# Altium PCB team-snax-mainboard.PcbDoc
Units mm, origin at the board's own origin, x right, y up, seen from the top; angles counter-clockwise.
Board outline 40.2 x 40.2 mm, 4 copper layers (Top Layer, GND 1, GND 2, Bottom Layer), stack 1.586 mm thick; 65 components, 50 nets, 261 pads, 163 vias.
Unrouted connection lines stored in the file: 1.
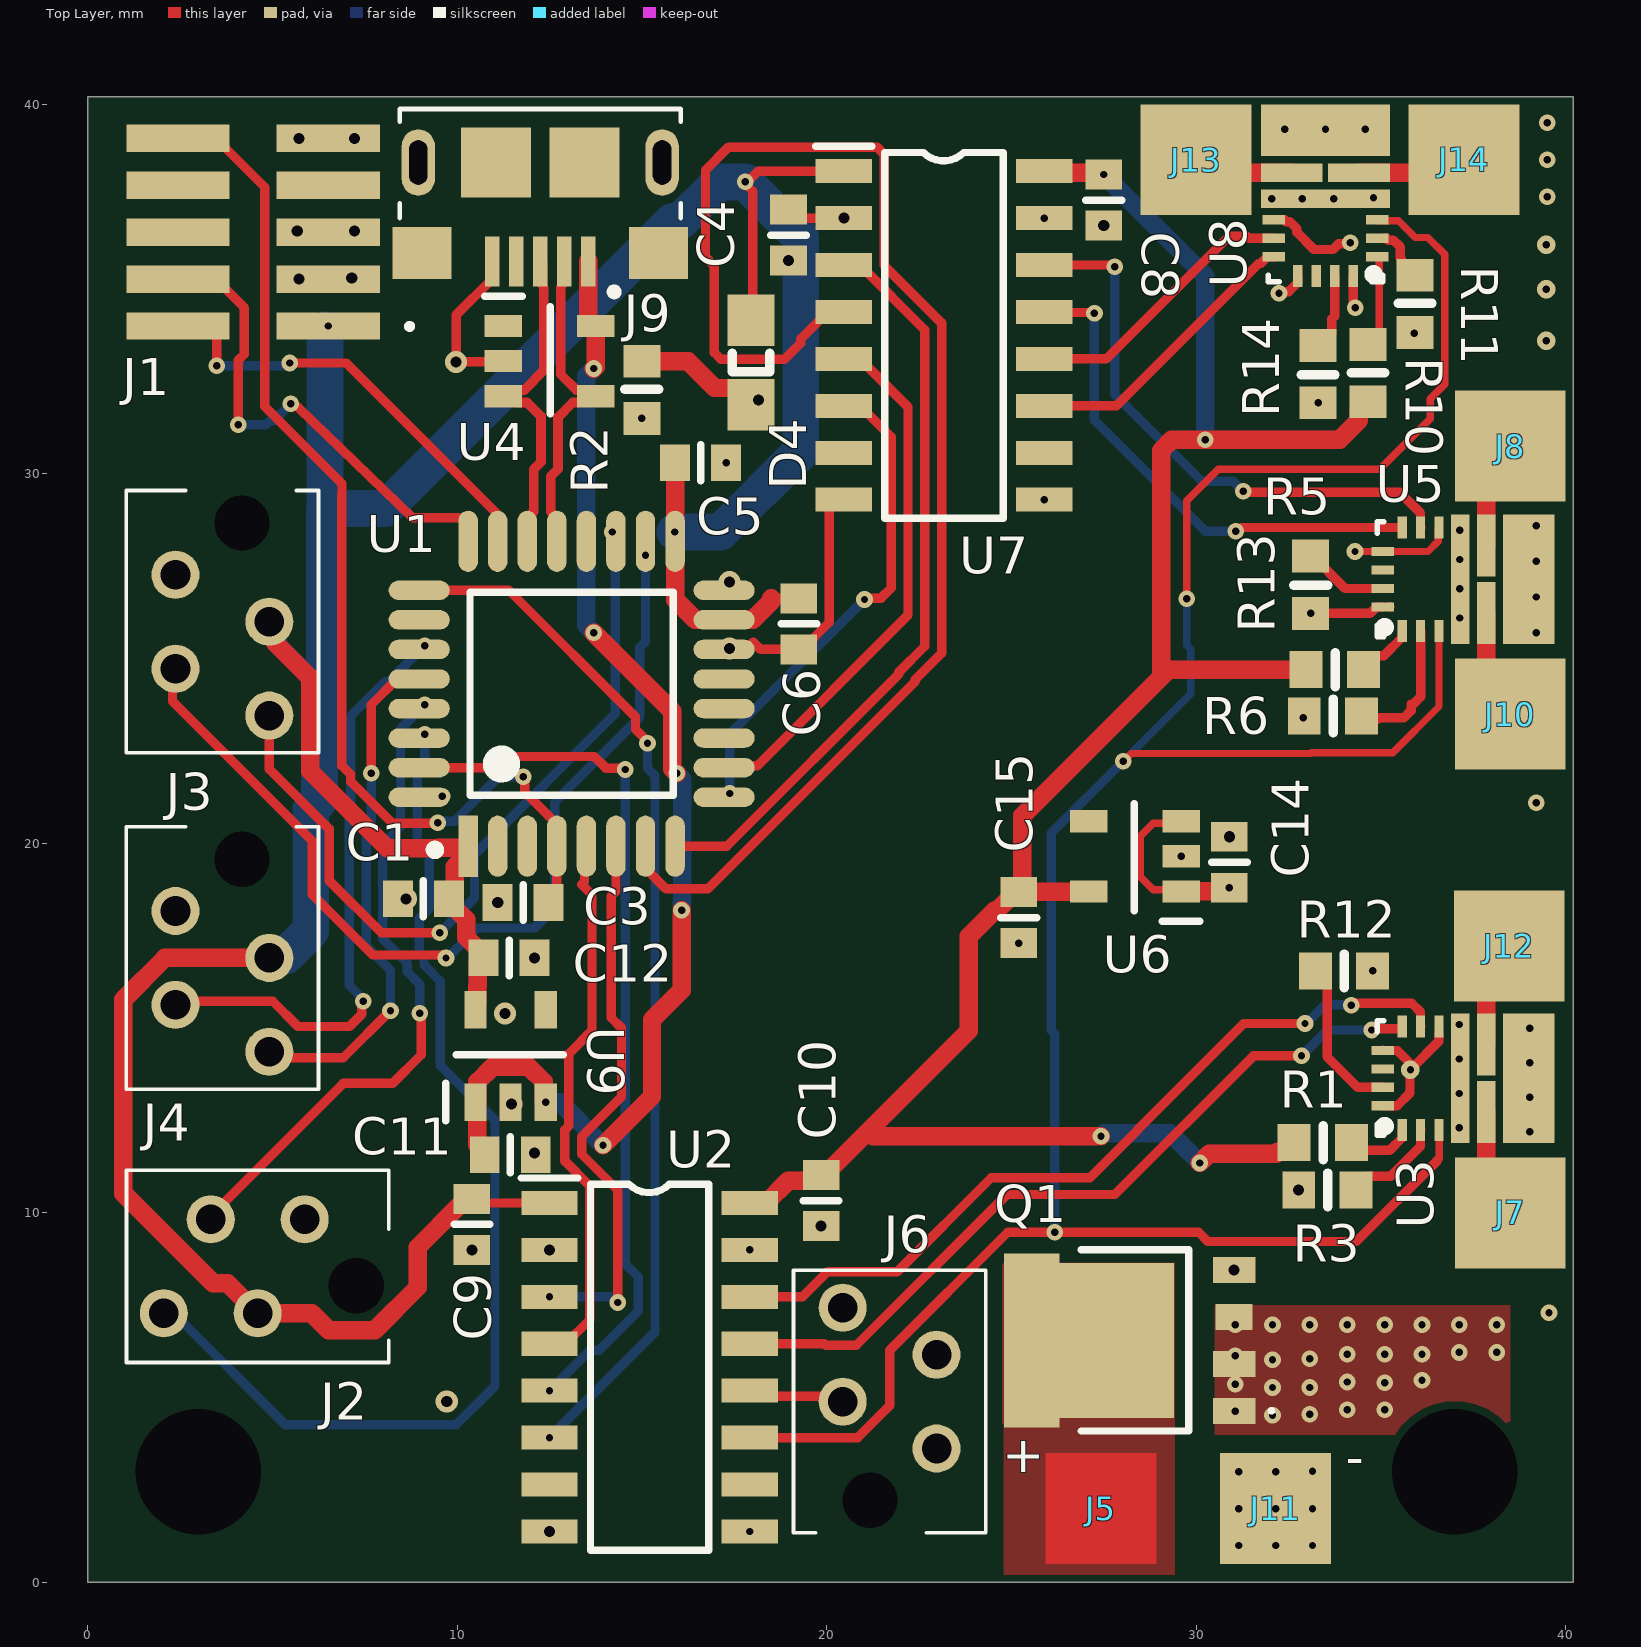
[diagram p0: Top Layer view]
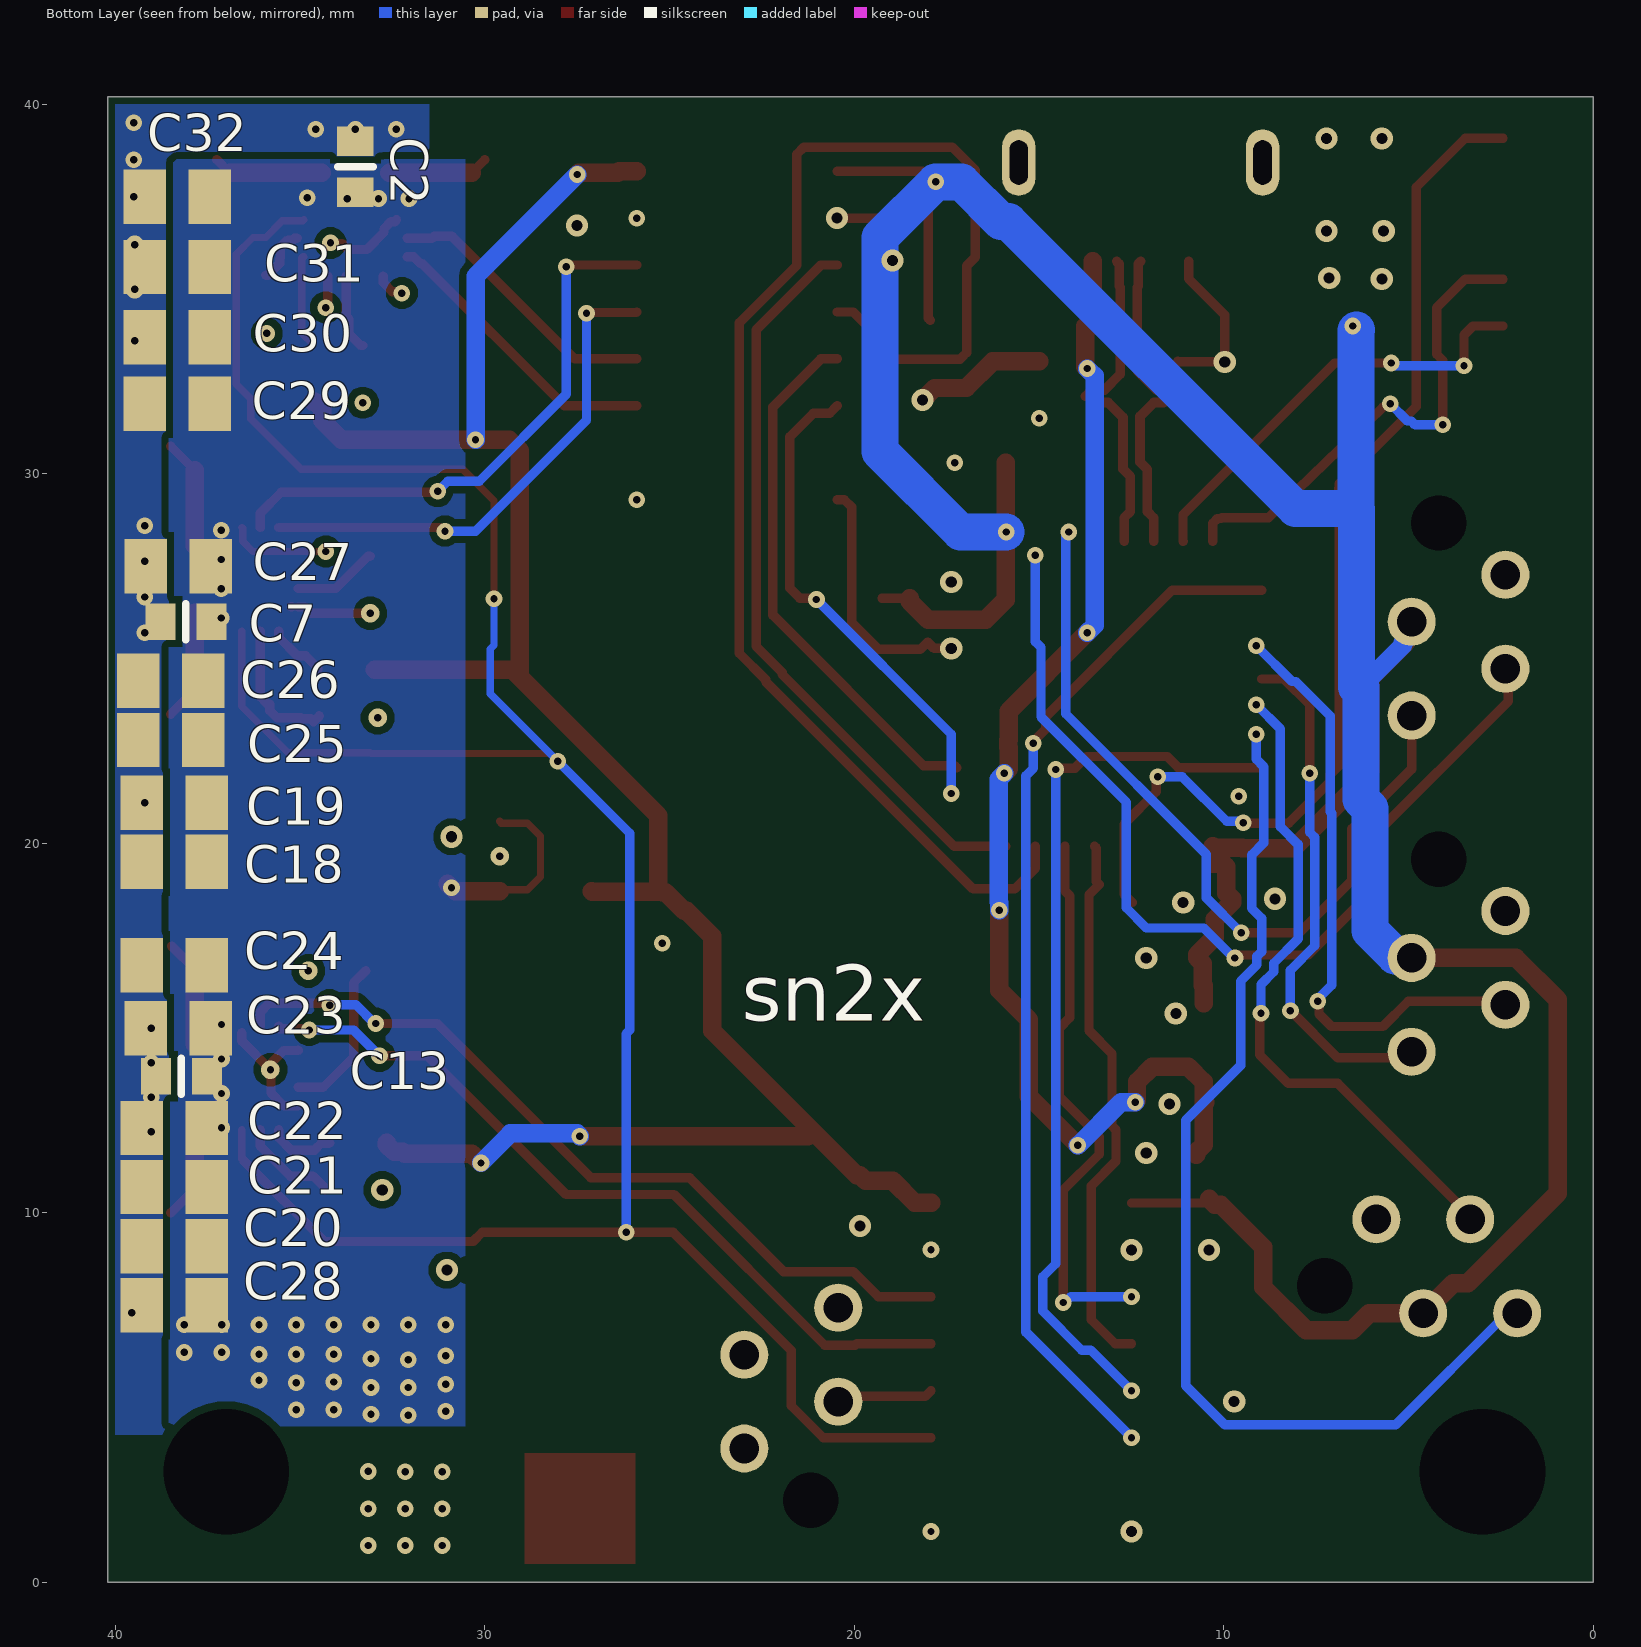
[diagram p1: Bottom Layer view, seen from below]
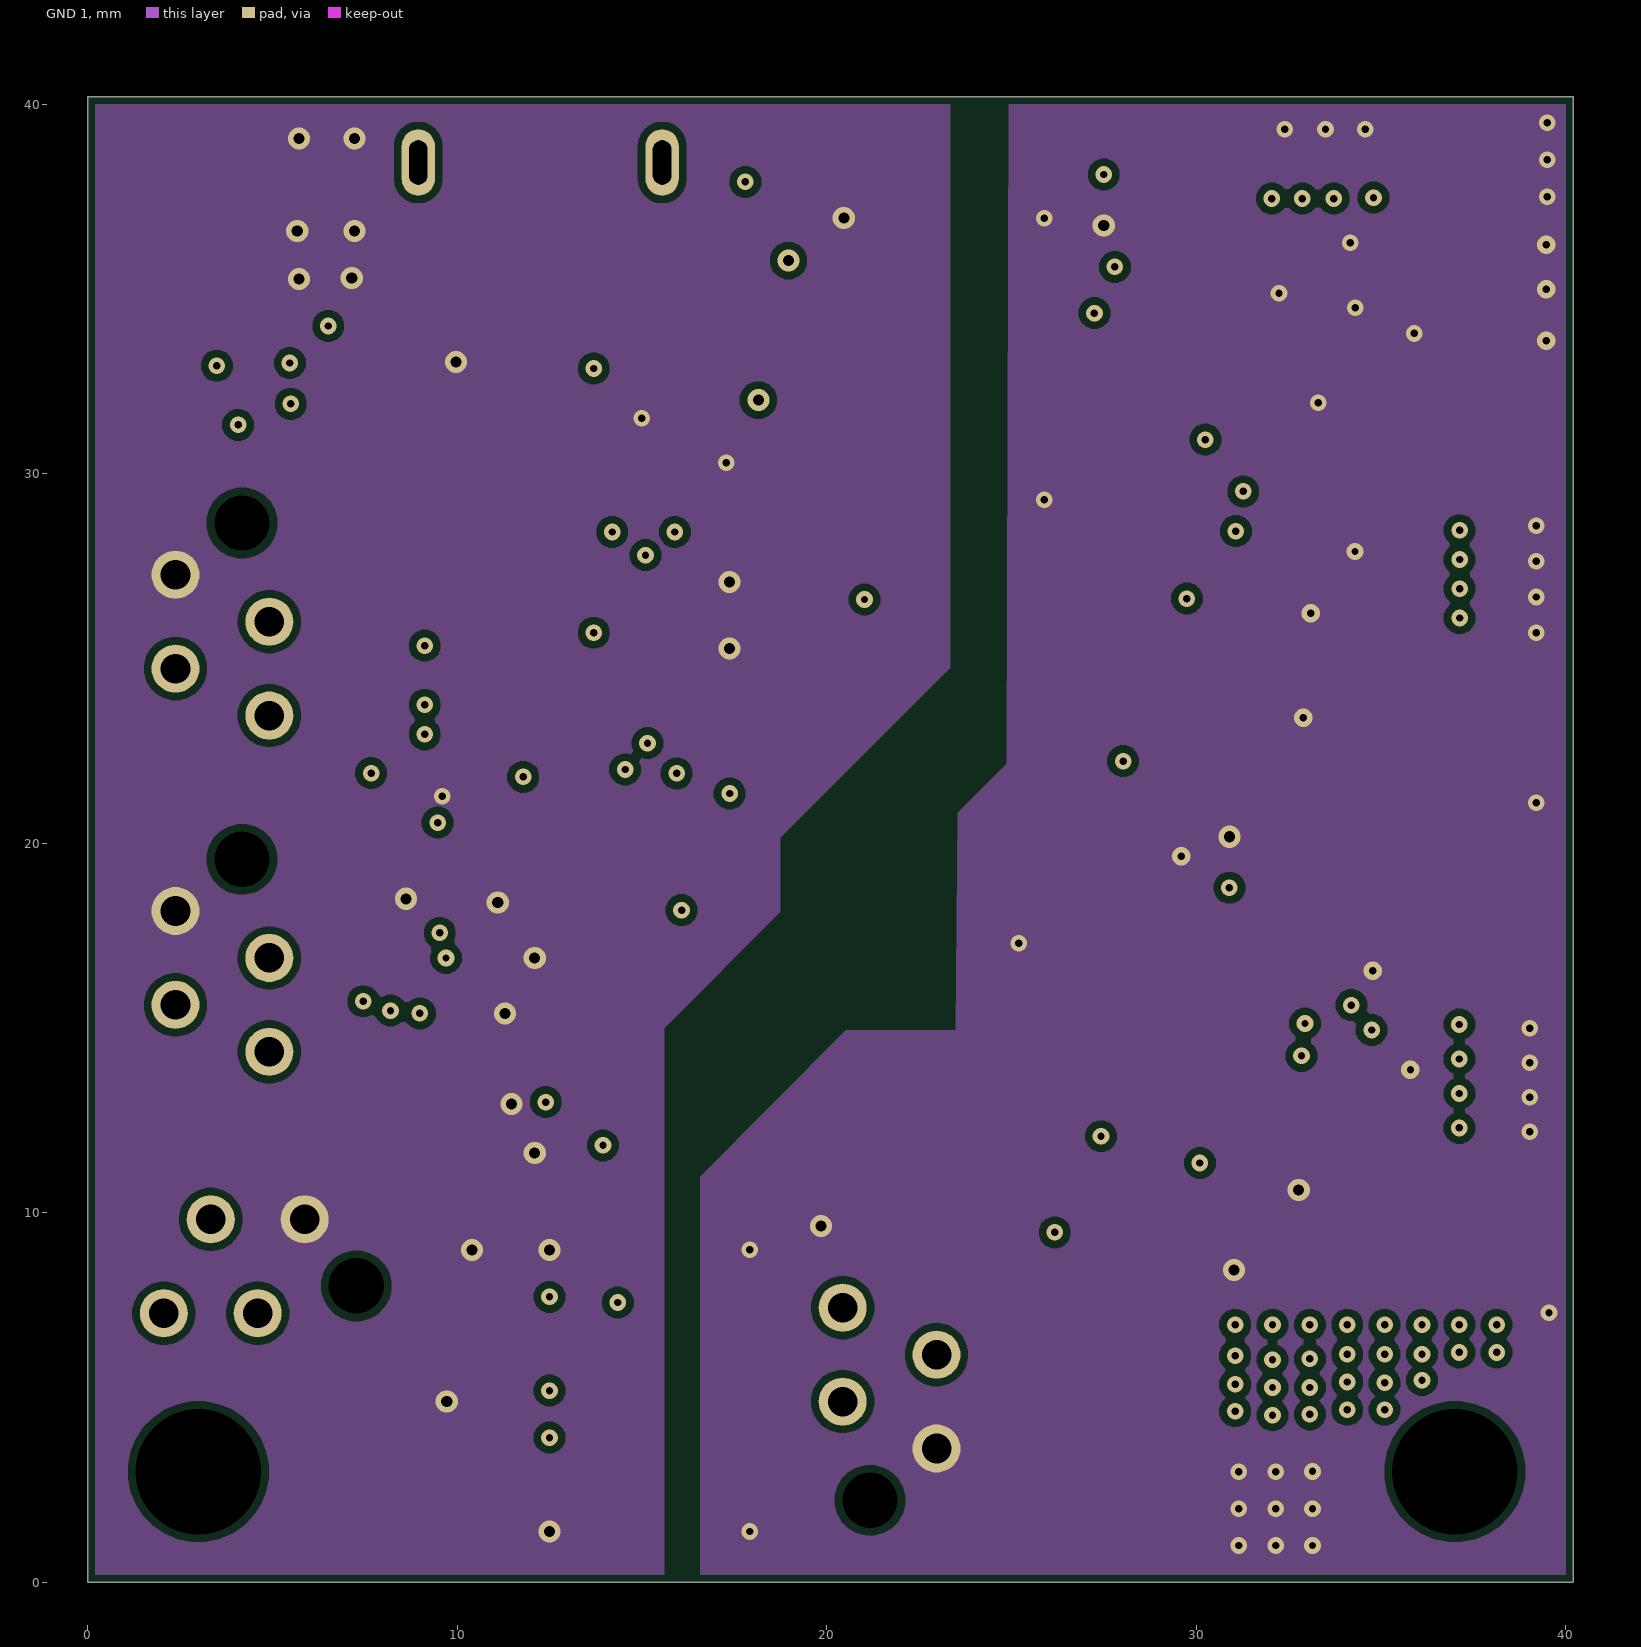
[diagram p2: GND 1]
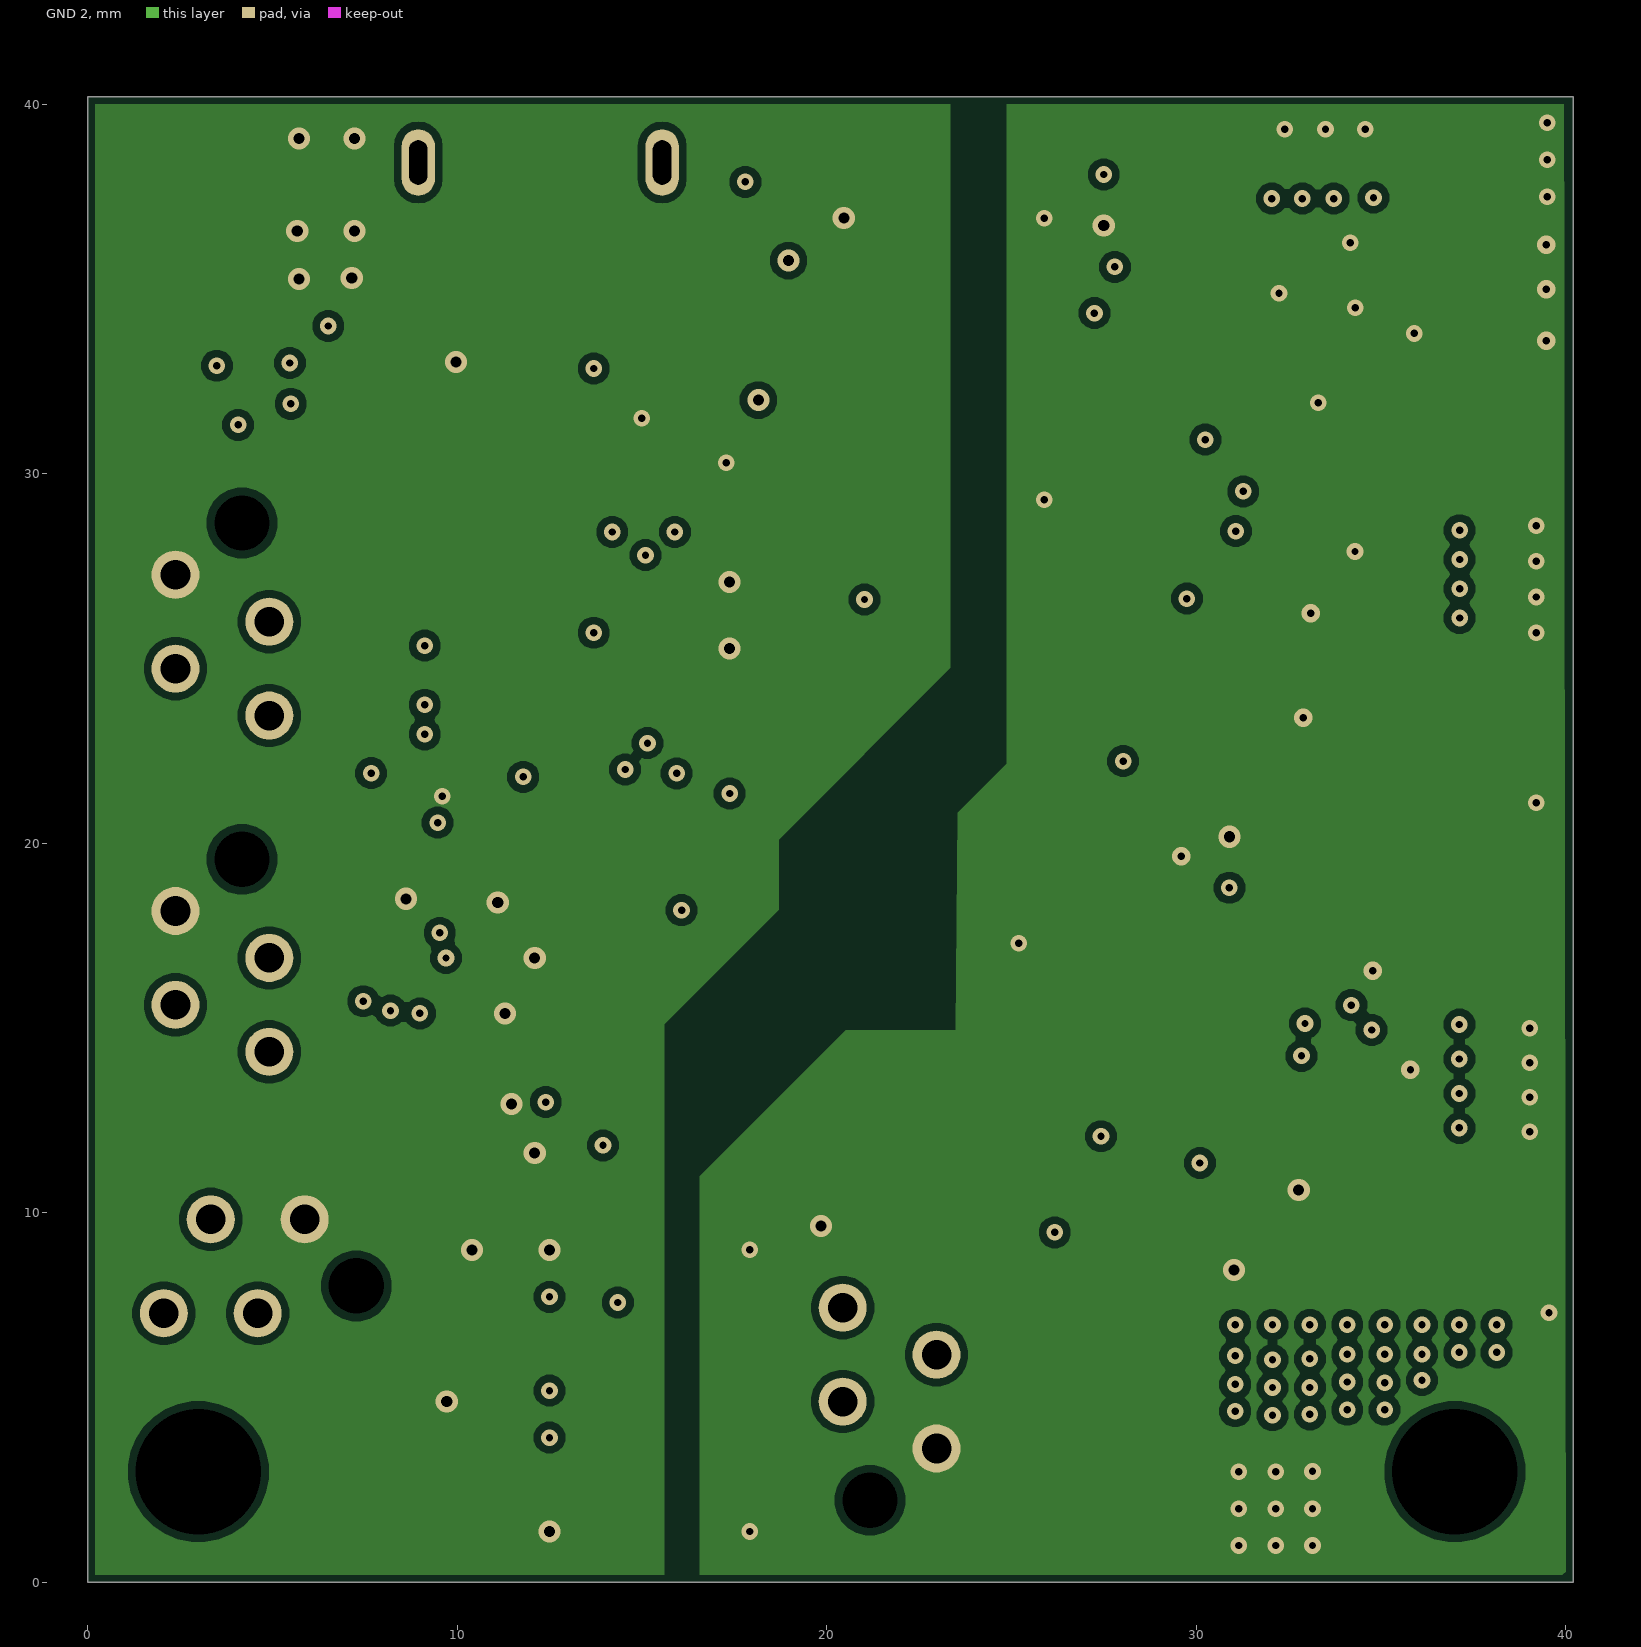
[diagram p3: GND 2]
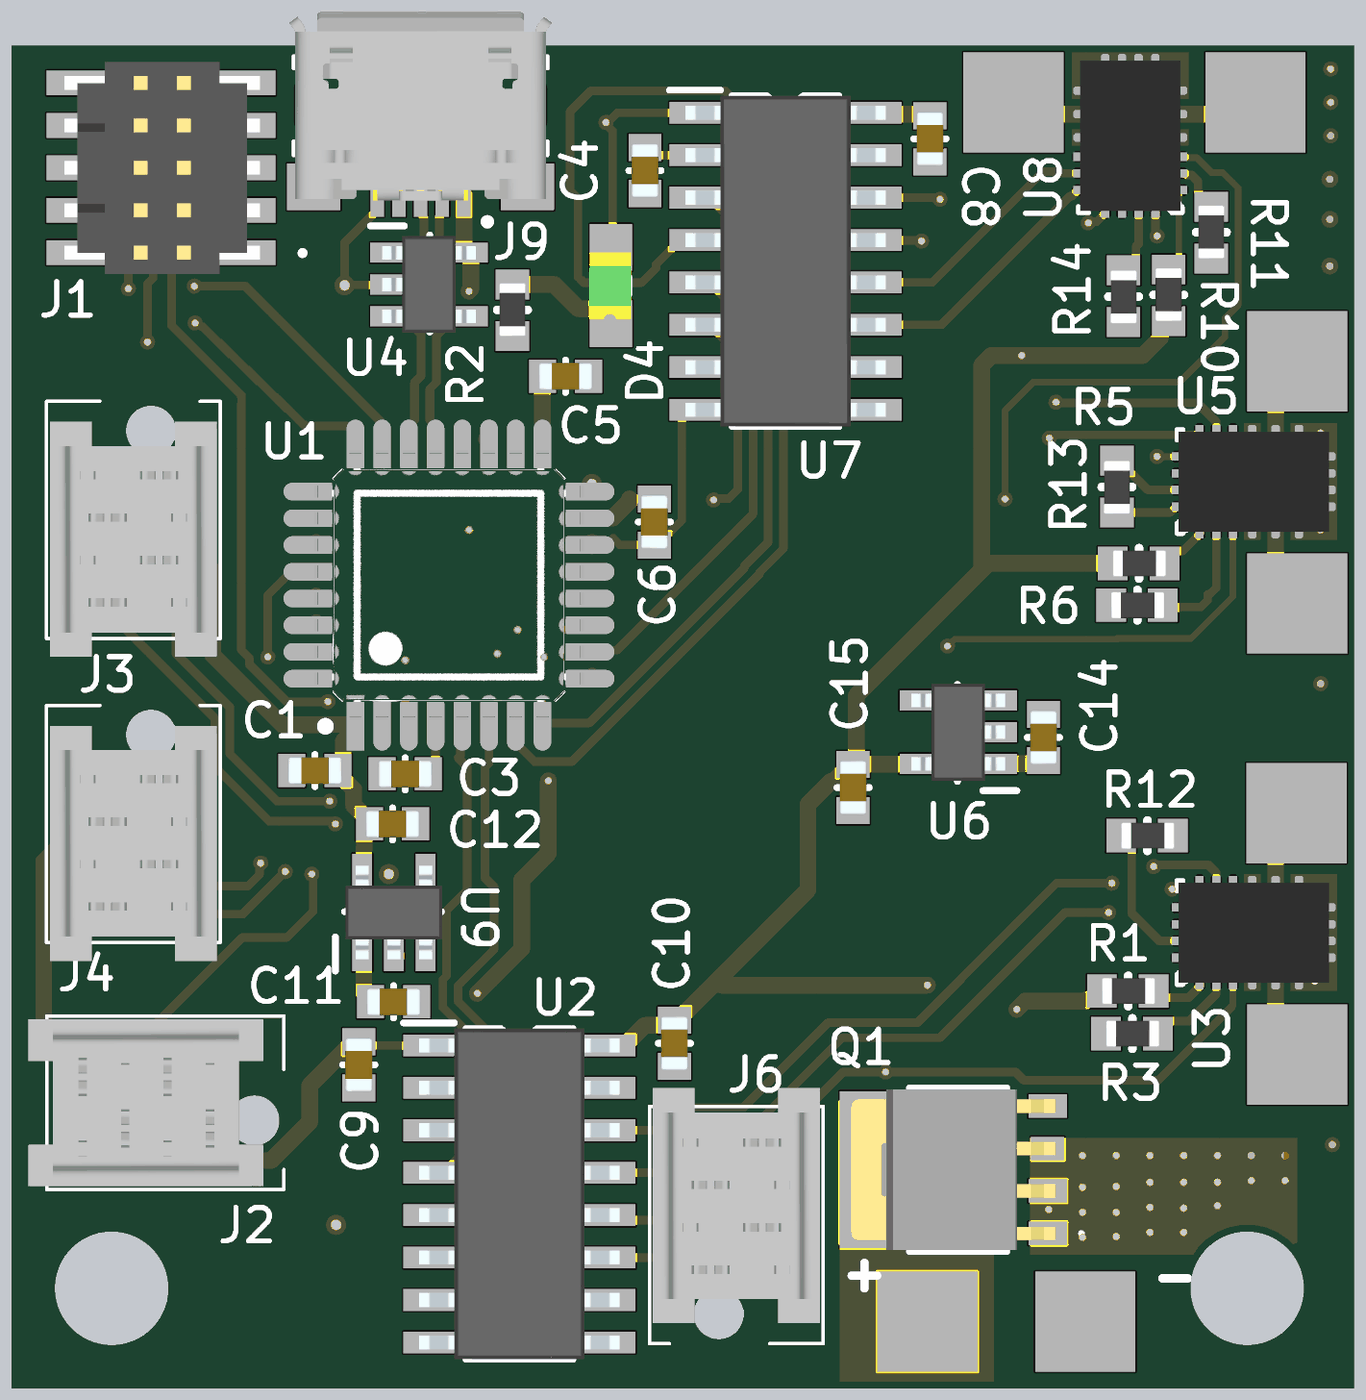
[diagram p4: 3D render of the assembled board from above, using the file's embedded part models]
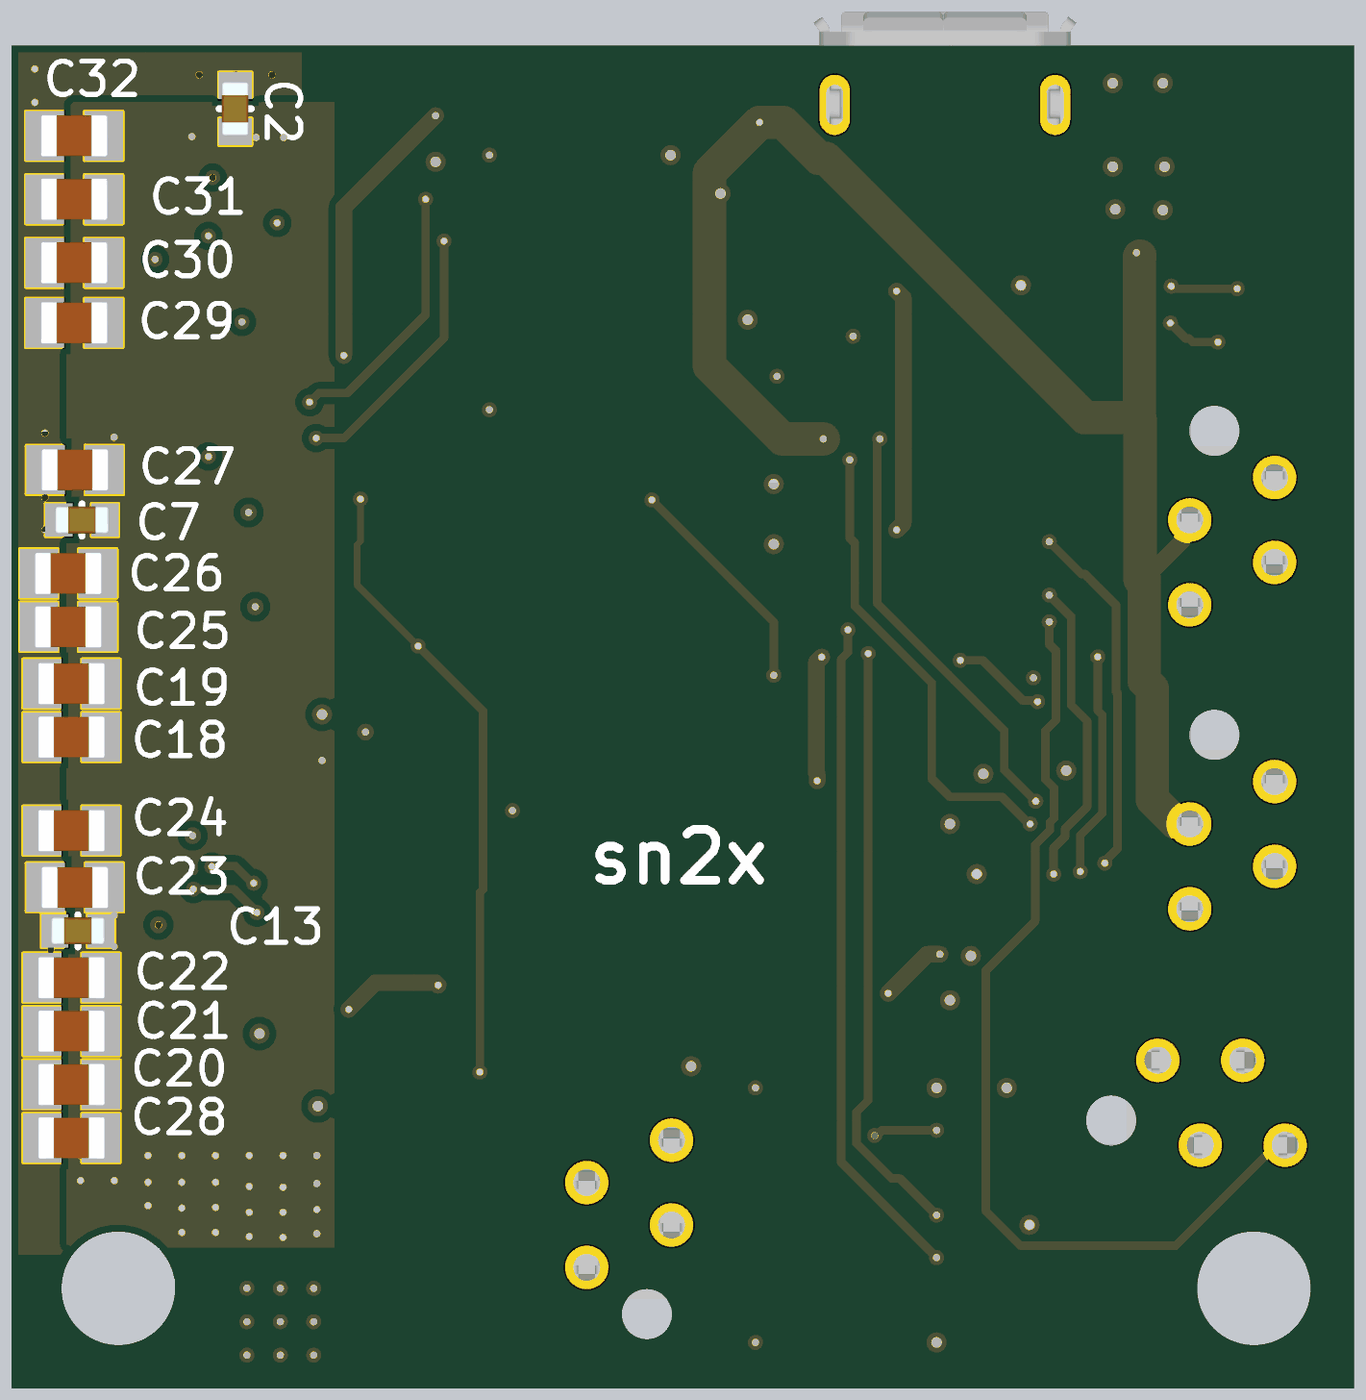
[diagram p5: 3D render of the assembled board from below, using the file's embedded part models]

## Layer stack, top to bottom
Top Solder: solder mask 0.0203, Solder Resist, Dk 3.8
Top Layer: signal copper 0.035
Dielectric 1: prepreg 0.2104, 7628, Dk 4.6
GND 1: signal copper 0.0152
Dielectric 2: dielectric 1.065, Core, Dk 4.6
GND 2: signal copper 0.0152
Dielectric 3: prepreg 0.2104, 7628, Dk 4.6
Bottom Layer: signal copper 0.035
Bottom Solder: solder mask 0.0203, Solder Resist, Dk 3.8

## Board outline
0,0 40.2,0 40.2,40.2 0,40.2

## Design rules (kind name [scope] priority, off if disabled: settings)
BoardOutlineClearance [All] p1: gap=0.2 ignorepadtopadclearanceinfootprint=FALSE except(0: Arc-SplitContinuation Track-SplitContinuation SMDPad-SplitContinuation THPad-SplitContinuation Via-SplitContinuation Fill-SplitContinuation Poly-SplitContinuation Region-SplitContinuation Text-SplitContinuation)
Clearance [All] p1: gap=0.2 ignorepadtopadclearanceinfootprint=TRUE except(0: Arc-Hole Track-Hole SMDPad-Hole THPad-Hole Via-Hole Fill-Hole Poly-Hole Region-Hole Text-Hole)
DiffPairsRouting DiffPairsRouting_USB [InDifferentialPairClass('USB')] p1: maxlimit=0.2 minlimit=0.2 mostfreqgap=0.2 toplayer_minwidth=0.26 toplayer_maxwidth=0.26 toplayer_prefwidth=0.26 midlayer1_minwidth=0.26 midlayer1_maxwidth=0.26 midlayer1_prefwidth=0.26 midlayer2_minwidth=0.26 midlayer2_maxwidth=0.26 midlayer2_prefwidth=0.26 bottomlayer_minwidth=0.26 bottomlayer_maxwidth=0.26 bottomlayer_prefwidth=0.26 maxuncoupledlength=12.7
DiffPairsRouting [All] p2: maxlimit=0.2 minlimit=0.2 mostfreqgap=0.2 toplayer_minwidth=0.15 toplayer_maxwidth=0.15 toplayer_prefwidth=0.15 midlayer1_minwidth=0.15 midlayer1_maxwidth=0.15 midlayer1_prefwidth=0.15 midlayer2_minwidth=0.15 midlayer2_maxwidth=0.15 midlayer2_prefwidth=0.15 bottomlayer_minwidth=0.15 bottomlayer_maxwidth=0.15 bottomlayer_prefwidth=0.15 maxuncoupledlength=12.7
HoleSize [All] p1: absolutevalues=TRUE maxlimit=6.3 minlimit=0.2 maxpercent=80.000 minpercent=20.000
HoleToHoleClearance [All] p1: gap=0.5 allowstackedmicrovias=TRUE
MinimumSolderMaskSliver [All] p1: minsoldermaskwidth=0.1
PolygonConnect [All] p1: connectstyle=Direct reliefconductorwidth=0.254 reliefentries=4 polygonreliefangle="90 Angle" airgapwidth=0.254
RoutingVias [All] p1: holewidth=0.2 width=0.45 viastyle="Through Hole" minholewidth=0.2 minwidth=0.4 maxholewidth=1 maxwidth=1.5
SilkToSilkClearance [All] p1: silktosilkclearance=0.2
SilkToSolderMaskClearance [IsPad] p1: minsilkscreentomaskgap=0.15 clearancetoexposedcopper=TRUE
SolderMaskExpansion SolderMaskExpansionVIA [IsVia] p1: expansion=0.102 istentingtop=TRUE
SolderMaskExpansion [All] p2: expansion=0.05 istentingtop=FALSE
UnRoutedNet [All] p1: checkbadconnections=TRUE
Width [All] p1: maxlimit=3 minlimit=0.2 preferedwidth=1 toplayer_prefwidth=0.254 midlayer1_prefwidth=0.254 midlayer2_prefwidth=0.254 minimp=50.000000 maximp=50.000000 favimp=50.000000
23 further rules are at their usual default settings.

## Classes and differential pairs
differential pair class USB: USB_D
differential pair USB_D: +USB_D_P -USB_D_N

## Components (designator, comment, footprint, x,y, rotation, side; value= is the part's Value field where it differs from the comment)
C1 "Cap_1" Cap_0603 9.9,18.5 r0 top value="0.1uF 0603"
C2 "Cap" Cap_0603 33.5,37.497 r270 bottom value="0.1uF 0603"
C3 "Cap" Cap_0603 12.603,18.4 r0 top value="0.1uF 0603"
C4 "Cap" Cap_0603 18.969,37.274 r90 top value="0.1uF 0603"
C5 "Cap_1" Cap_0603 15.777,30.3 r180 top value="0.1uF 0603"
C6 "Cap_1" Cap_0603 19.25,26.753 r90 top value="0.1uF 0603"
C7 "Cap" Cap_0603 37.277,26 r180 bottom value="0.1uF 0603"
C8 "Cap" Cap_0603 27.5,38.223 r90 top value="0.1uF 0603"
C9 "Cap" Cap_0603 10.4,8.877 r270 top value="0.1uF 0603"
C10 "Cap" Cap_0603 19.85,11.148 r90 top value="0.1uF 0603"
C11 "Cap" Cap_0603 10.627,11.575 r180 top value="1uF 0603"
C12 "Cap" Cap_0603 10.597,16.9 r180 top value="1uF 0603"
C13 "Cap" Cap_0603 37.397,13.7 r180 bottom value="0.1uF 0603"
C14 "Cap_1" Cap_0603 30.9,18.677 r270 top value="1uF 0603"
C15 "Cap_1" Cap_0603 25.2,18.803 r90 top value="1uF 0603"
C18 "Cap_1" CAP_0805 38.4,19.5 r180 bottom value="10uF 0805"
C19 "Cap_1" CAP_0805 38.4,21.1 r180 bottom value="10uF 0805"
C20 "Cap_1" CAP_0805 38.4,9.1 r180 bottom value="10uF 0805"
C21 "Cap_1" CAP_0805 38.4,10.7 r180 bottom value="10uF 0805"
C22 "Cap_1" CAP_0805 38.4,12.3 r180 bottom value="10uF 0805"
C23 "Cap_1" CAP_0805 38.3,15 r180 bottom value="10uF 0805"
C24 "Cap_1" CAP_0805 38.4,16.7 r180 bottom value="10uF 0805"
C25 "Cap_1" CAP_0805 38.5,22.8 r180 bottom value="10uF 0805"
C26 "Cap_1" CAP_0805 38.5,24.4 r180 bottom value="10uF 0805"
C27 "Cap_1" CAP_0805 38.3,27.5 r180 bottom value="10uF 0805"
C28 "Cap_1" CAP_0805 38.4,7.5 r180 bottom value="10uF 0805"
C29 "Cap_1" CAP_0805 38.32,31.9 r180 bottom value="10uF 0805"
C30 "Cap_1" CAP_0805 38.32,33.7 r180 bottom value="10uF 0805"
C31 "Cap_1" CAP_0805 38.32,35.6 r180 bottom value="10uF 0805"
C32 "Cap_1" CAP_0805 38.32,37.5 r180 bottom value="10uF 0805"
D4 "LED-GREEN" LED0805G 17.95,34.161 r270 top
J1 "FTSH-105-01-L-DV-K" FTSH10501LDVK 6.515,36.54 r90 top
J2 "215079-4" 2150794 5.875,9.825 r0 top
J3 "215079-4" 2150794 2.38,27.27 r90 top
J4 "215079-4" 2150794 2.38,18.17 r90 top
J5 "Bat+" "3x3mm pad"#1 27.425,1.602 r0 top
J6 "215079-4" 2150794 22.975,3.625 r270 top
J7 "M1_1" "3x3mm pad"#2 38.5,10 r90 top
J8 "M2_2" "3x3mm pad"#2 38.5,30.75 r90 top
J9 "10118193-0001LF" "USB port" 12.25,38.425 r180 top
J10 "M2_1" "3x3mm pad"#2 38.5,23.5 r90 top
J11 "Bat-" "3x3mm pad"#3 32.15,1.602 r0 top
J12 "M1_2" "3x3mm pad"#2 38.475,17.225 r90 top
J13 "M3_2" "3x3mm pad"#2 30,38.5 r180 top
J14 "M3_1" "3x3mm pad"#2 37.25,38.5 r180 top
Q1 "BUK6Y14-40P" BUK6Y1440PX 28.288,6.55 r90 top
R1 "10k 0603" RES_0603 32.346,13.932 r90 top
R2 "1k 0603" RES_0603 12.968,31.195 r180 top
R3 "2.7K 0603" RES_0603 32.47,12.657 r90 top
R5 "10k 0603" RES_0603 32.671,26.732 r90 top
R6 "2.7k 0603" RES_0603 32.621,25.482 r90 top
R10 "10k 0603" RES_0603 32.618,31.646 r180 top
R11 "2.7K 0603" RES_0603 33.893,33.52 r180 top
R12 "100k 0603" RES_0603 32.921,18.582 r90 top
R13 "100k 0603" RES_0603 35.132,28.079 r0 top
R14 "100k 0603" RES_0603 35.332,33.779 r0 top
U1 "STM32G431KBT6" FP-LQFP32-5V-IPC_B 13.1,24.05 r90 top
U2 "MAX14930DASE+" SOIC-16N 15.034,6.079 r0 top
U3 "PDRV8243HRXYQ1" RXY0014A-MFG 37.2,13.648 r90 top
U4 "CM1223-02SO" SOT23-5 15.02,33.238 r0 top
U5 "PDRV8243HRXYQ1" RXY0014A-MFG 37.2,27.148 r90 top
U6 "NCV8730ASN500T1G" SOT23-5 25.83,19.462 r180 top
U7 "MAX14930DASE+" SOIC-16N 23,34 r0 top
U8 "PDRV8243HRXYQ1" RXY0014A-MFG 33.5,37.5 r180 top
U9 "NCP164CSN330T1G" SOT23-5 11.262,16.77 r90 top

## Footprints (in the part's own frame and the unit in brackets; to place one, negate y for a bottom-side part, rotate by r counter-clockwise, add the part's x,y. Pads: shape width x height; smd on the part's side, far side on the other; paste and mask are expansions set on the pad)
"3x3mm pad"#1 [mil]
  round 1 smd: +(0,15.69)
  Top Layer region: -59.06,-43.37 -59.06,74.74 59.05,74.74 59.05,-43.37
"3x3mm pad"#2 [mil]
  rect 118.11x118.11 smd: 1(0,0)
"3x3mm pad"#3 [mil]
  rect 118.11x118.11 smd: 1(0,15.69)
2150794 [mm]
  round 1.3 hole 0.8: 1(0,0) 2(-1.27,-2.54) 3(-2.54,0) 4(-3.81,-2.54)
  round 0.75 hole 1.5 unplated: 5(1.4,-1.8)
  silkscreen extent -4.82,-3.87 2.28,1.33, body extent -5.37,-3.77 1.67,1.23, height 4.05
BUK6Y1440PX [mm]
  rect 0.7x1.15 smd: 1(-1.905,-2.737) 2(-0.635,-2.737) 4(1.905,-2.737)
  rect 0.7x1 smd: 3(0.635,-2.737)
  rect 4.7x1.5 smd: 5(0,2.738)
  rect 4.2x3.1 smd: 6(0,0.438)
  silkscreen extent -2.45,-3.8 2.45,1.4, body extent -2.4,-2.97 2.4,3.14, height 1
Cap_0603 [mm]
  rect 0.81x0.99 smd: 1(-1.503,0) 2(-0.123,0)
  silkscreen extent -0.81,-0.48 -0.81,0.48, body extent -1.63,-0.41 0,0.41, height 0.95
CAP_0805 [mm]
  rect 1.15x1.47 smd: 1(-0.88,0) 2(0.88,0)
  body extent -1,-0.63 1,0.63, height 1
FP-LQFP32-5V-IPC_B [mm]
  rect 1.655x0.526 smd paste+0 mask+0: 1(-4.125,2.8)
  rrect100% 1.655x0.526 smd paste+0 mask+0: 2(-4.125,2) 3(-4.125,1.2) 4(-4.125,0.4) 5(-4.125,-0.4) 6(-4.125,-1.2) 7(-4.125,-2) 8(-4.125,-2.8) 17(4.125,-2.8) 18(4.125,-2) 19(4.125,-1.2) 20(4.125,-0.4) 21(4.125,0.4) 22(4.125,1.2) 23(4.125,2) 24(4.125,2.8)
  rrect100% 0.526x1.655 smd paste+0 mask+0: 9(-2.8,-4.125) 10(-2,-4.125) 11(-1.2,-4.125) 12(-0.4,-4.125) 13(0.4,-4.125) 14(1.2,-4.125) 15(2,-4.125) 16(2.8,-4.125) 25(2.8,4.126) 26(2,4.126) 27(1.2,4.126) 28(0.4,4.126) 29(-0.4,4.126) 30(-1.2,4.126) 31(-2,4.126) 32(-2.8,4.126)
  silkscreen extent -4.35,-2.75 2.75,3.82, body extent -5.2,-5.2 5.2,5.2, height 0.25
FTSH10501LDVK [mm]
  rect 0.74x2.79 smd: 1(-2.54,0) 2(-2.54,4.07) 3(-1.27,0) 4(-1.27,4.07) 5(0,0) 6(0,4.07) 7(1.27,0) 8(1.27,4.07) 9(2.54,0) 10(2.54,4.07)
  silkscreen extent -2.6,-2.25 -2.5,-2.15, body extent -3.18,-0.92 3.17,4.93, height 6.13
LED0805G [mil] "SMD; Green LED; Body 2.1 x 1.35 mm"
  rect 55x50 smd: A(0,0) K(90,0)
  silkscreen extent 35,-20 55,20, body extent 6,-26 85,24, height 39
RES_0603 [mil]
  rect 39.37x35 smd: 1(-80,-73) 2(-80,-12)
  silkscreen extent -98,-43 -62,-43, body extent -96,-75 -64,-12, height 35
RXY0014A-MFG [mm]
  rect 0.6x0.25 smd paste+0 mask-0.292: 1(-1.4,1.625) 2(-1.4,1.125) 3(-1.4,0.625) 8(1.4,0.625) 9(1.4,1.125) 10(1.4,1.625)
  rect 3.5x0.5 smd paste-1.737 mask-1.74: 4(0,0.05)
  rect 1.675x0.5 smd paste-0.825 mask-0.826: 5(-0.912,-0.65) 7(0.913,-0.65)
  rect 3.5x1.4 smd paste-1.737 mask-1.74: 6(0,-1.8)
  rect 0.25x0.6 smd paste+0 mask-0.292: 11(0.75,2.15) 12(0.25,2.15) 13(-0.25,2.15) 14(-0.75,2.15)
  silkscreen extent -1.55,1.97 1.55,2.3, body extent -1.5,-2.25 1.5,2.25, height 1
SOIC-16N [mm]
  rect 1.525x0.65 smd: 1(-2.534,4.191) 2(-2.534,2.921) 3(-2.534,1.651) 4(-2.534,0.381) 5(-2.534,-0.889) 6(-2.534,-2.159) 7(-2.534,-3.429) 8(-2.534,-4.699) 9(2.89,-4.699) 10(2.89,-3.429) 11(2.89,-2.159) 12(2.89,-0.889) 13(2.89,0.381) 14(2.89,1.651) 15(2.89,2.921) 16(2.89,4.191)
  silkscreen extent -3.3,-5.2 1.78,4.87, body extent -2.82,-5.2 3.18,4.7, height 1.75
SOT23-5 [mm]
  rect 1.016x0.6 smd: 1(-3.77,0.762) 2(-3.77,-0.188) 3(-3.77,-1.138) 4(-1.27,-1.138) 5(-1.27,0.762)
  silkscreen extent -4.27,-1.61 -2.49,1.56, body extent -3.92,-1.64 -1.12,1.26, height 1.45
"USB port" [mm]
  rect 0.4x1.35 smd: 1(-1.3,2.675) 2(-0.65,2.675) 3(0,2.675) 4(0.65,2.675) 5(1.3,2.675)
  rect 1.6x1.4 smd: S1(-3.2,2.45) S2(3.2,2.45)
  rect 1.9x1.9 smd: S3(1.2,0) S4(-1.2,0)
  oval 0.9x1.8 hole 0.5 slot 1.2 at 90 deg: S5(-3.3,0) S6(3.3,0)
  silkscreen extent -3.8,-1.45 3.8,3.6, body extent -3.93,-2.79 3.93,2.87, height 2.88

## Part data
C1 C5 C6 C14 C15: library part Cap, "Capacitor", LatestRevisionDate=17-Jul-2002, LatestRevisionNote="Re-released for DXP Platform.", PackageDescription="Radial Cap, Thru-Hole; 2 Leads; 0.3 in Pin Spacing", PackageReference=RAD-0.3, Published=8-Jun-2000, Publisher="Altium Limited"
C2 C3 C4 C7 C8 C9 C10 C11 C12 C13 C18 C19 C20 C21 C22 C23 C24 C25 C26 C27 C28 C29 C30 C31 C32: "Capacitor", LatestRevisionDate=17-Jul-2002, LatestRevisionNote="Re-released for DXP Platform.", PackageDescription="Radial Cap, Thru-Hole; 2 Leads; 0.3 in Pin Spacing", PackageReference=RAD-0.3, Published=8-Jun-2000, Publisher="Altium Limited"
D4: library part "SMD 0805 LED-GREEN", "GREEN  LED,Case 0805", Supplier Part Number 1=1716766, Supplier 1=Farnell
J1: "Connector", Manufacturer_Name=SAMTEC, Mouser Part Number=200-FTSH10501LDVK, Arrow Part Number=FTSH-105-01-L-DV-K, Arrow Price/Stock=https://www.arrow.com/en/products/ftsh-105-01-l-dv-k/samtec?region=europe, Datasheet Link=https://www.arrow.com/en/products/ftsh-105-01-l-dv-k/samtec, Height=6.1mm, Manufacturer_Part_Number=FTSH-105-01-L-DV-K, Mouser Price/Stock=https://www.mouser.co.uk/ProductDetail/Samtec/FTSH-105-01-L-DV-K?qs=%252B5JSS813miOqo3Vy%252BvhCFg%3D%3D
J2 J3 J4 J6: "Connector", Manufacturer_Name="TE Connectivity", Mouser Part Number=571-215079-4, Arrow Part Number=215079-4, Arrow Price/Stock=https://www.arrow.com/en/products/215079-4/te-connectivity, Datasheet Link=https://www.te.com/commerce/DocumentDelivery/DDEController?Action=srchrtrv&DocNm=215079&DocType=Customer+Drawing&DocLang=English, Height=4.2mm, Manufacturer_Part_Number=215079-4, Mouser Price/Stock=https://www.mouser.co.uk/ProductDetail/TE-Connectivity/215079-4?qs=O3N86PA0UL%252BdoZEVcFx8sQ%3D%3D
J5 J7 J8 J10 J11 J12 J13 J14: library part "Connector pad"
J9: "USB - micro B USB 2.0 Receptacle Connector 5 Position Surface Mount, Right Angle; Through Hole", Package=None, Availability=Unavailable, MF="Amphenol ICC", MP=10118193-0001LF, Price=None, SnapEDA_Link=https://www.snapeda.com/parts/10118193-0001LF/Amphenol%20FCI/view-part/2758989/?ref=snap
Q1: library part BUK6Y14-40PX, "MOSFET (P-Channel)", Manufacturer_Name=Nexperia, Mouser Part Number=771-BUK6Y14-40PX, Datasheet Link=https://assets.nexperia.com/documents/data-sheet/BUK6Y14-40P.pdf, Height=1.2mm, Manufacturer_Part_Number=BUK6Y14-40PX, Mouser Price/Stock=https://www.mouser.co.uk/ProductDetail/Nexperia/BUK6Y14-40PX?qs=vmHwEFxEFR91d%252BcXKqAEkw%3D%3D
R1 R2 R3 R5 R6 R10 R11 R12 R13 R14: library part Res1, "Resistor", LatestRevisionDate=17-Jul-2002, LatestRevisionNote="Re-released for DXP Platform.", PackageDescription="Axial Device, Thru-Hole; 2 Leads; 0.3 in Pin Spacing", PackageReference=AXIAL-0.3, Published=8-Jun-2000, Publisher="Altium Limited"
U1: library part CMP-12105-000140-1, "IC MCU 32BIT 128KB FLASH 32LQFP"
U2 U7: library part MAX14930DAWE+, "Integrated Circuit", Manufacturer_Name="Maxim Integrated", Mouser Part Number=700-MAX14930DAWE+, Datasheet Link=https://datasheets.maximintegrated.com/en/ds/MAX14130-MAX14932.pdf, Height=2.65mm, Manufacturer_Part_Number=MAX14930DAWE+, Mouser Price/Stock=https://www.mouser.co.uk/ProductDetail/Maxim-Integrated/MAX14930DAWE%2b?qs=AAveGqk956FMXGKxABEd7w%3D%3D
U3 U5 U8: "No Description Available", Mfr_Name="Texas Instruments", Copyright="Copyright (C) 2022 Ultra Librarian. All rights reserved.", Manufacturer_Part_Number=PDRV8243HRXYQ1, RefDes=RefDes, Type=DEV
U4: library part SP3003-02JTG, "Integrated Circuit", Manufacturer_Name=LITTELFUSE, Mouser Part Number=576-SP3003-02JTG, Arrow Part Number=SP3003-02JTG, Arrow Price/Stock=https://www.arrow.com/en/products/sp3003-02jtg/littelfuse?region=nac, Datasheet Link=https://datasheet.datasheetarchive.com/originals/distributors/Datasheets-DGA26/1840396.pdf, Height=1.1mm, Manufacturer_Part_Number=SP3003-02JTG, Mouser Price/Stock=https://www.mouser.co.uk/ProductDetail/Littelfuse/SP3003-02JTG?qs=je4hkJKt%2FJ1VE%2FhJSW73jg%3D%3D
U9: library part NCV8730ASN500T1G_1

## Free pads (board coordinates)
  round 3 hole 3.4 unplated: 3(3,3) 3(37,3)
  round 3 all layers, no hole: ""(3,3)

## Via types
v1: diameter 0.45, hole 0.2, Top Layer to Bottom Layer, tented both sides, 116 vias
v2: diameter 0.6, hole 0.3, Top Layer to Bottom Layer, tented both sides, 27 vias
v3: diameter 0.45, hole 0.2, Top Layer to Bottom Layer, tented bottom, 12 vias
v4: diameter 0.5, hole 0.2, Top Layer to Bottom Layer, tented both sides, 8 vias

## Nets (pads, with @x,y where several pads share a name; then routed paths per layer and width w, separated by ;. In a path a pad name is that pad's centre, name@x,y a point inside that pad or via, vN(x,y) a via of type N, cw(c..) or ccw(c..) an arc to the next point about the centre after c; other vN are vias at no path point)
+3.3: C1.2 C4.1 C5.2 C6.2 C9.1 C12.2 D4.A J1.1 J2.2 J3.2 J4.2 U1.1 U1.15 U1.17 U2.1 U7.1 U9.5 | length 101.7
  Top Layer w0.254: C9.1 10.51,10.27 U2.1 ; D4.A 18,34.211 18,37.647 17.8,37.847 v1(17.8,37.9) 17.853,37.9 18.144,38.191 U7.1 ; 18.503,26.63 C6.2 ; C4.1@18.9,35.702 v2(18.969,35.771)
  Top Layer w0.5: J4.2 2.094,16.9 0.965,15.771 0.965,10.535 3.4,8.1 3.79,8.1 J2.2 6.067,7.285 6.527,6.825 7.772,6.825 8.93,7.983 8.93,9.067 10.089,10.225 10.245,10.225 C9.1 ; J3.2 5.073,25.847 5.073,25.427 6.032,24.468 6.032,21.947 8.105,19.875 9.505,19.875 9.506,19.876 10.287,19.876 10.287,19.911 U1.1 ; U1.1@10.3,19.889 10.3,19.458 10.287,19.445 10.01,19.445 9.932,19.368 9.932,18.655 C1.2 9.777,18.41 10.245,17.942 10.245,17.465 10.72,16.99 C12.2 10.565,16.745 10.565,16.165 10.55,16.15 U9.5@10.55,15.675 ; v1(15.893,28.426) 15.9,28.426 C5.2 ; U1.17@15.905,28.415 15.905,26.597 16.448,26.054 17.221,26.054 U1.15 17.23,26.054 18.003,26.054 18.503,26.554 18.503,26.63
  Bottom Layer w0.5: J3.2 4.8,26 4.8,25.784 5.16,25.423 5.16,25.353 6.283,24.23 6.41,24.23 ; v1@6.41,33.895 v1(6.515,34)
  Bottom Layer w1: J4.2 4.977,16.957 5.362,16.957 6.041,17.636 6.041,20.942 6.283,21.183 6.283,24.23 ; 6.41,24.23 6.41,29.048 6.425,29.063 ; v1@6.41,33.895 6.425,33.88 6.425,29.063 ; v1(15.893,28.426) 17.126,28.426 19.3,30.6 19.3,36.4 v1(17.8,37.9) 17.101,37.9 16.026,36.825 15.825,36.825 8.063,29.063 6.425,29.063
+5: C8.2 C10.2 C15.2 R1.2 R5.2 R10.2 U2.16 U6.5 U7.16 | length 59.9
  Top Layer w0.5: U2.16 18.362,10.27 18.962,10.87 19.695,10.87 C10.2 19.94,11.025 23.85,14.935 23.85,17.486 24.535,18.171 24.601,18.171 25.11,18.68 C15.2 C15.2@25.21,18.69 ; 21.256,12.075 v1(27.425,12.075) ; U7.16 26.357,38.191 26.402,38.145 27.455,38.145 v1(27.5,38.1) ; U6.5 27.09,18.69 C15.2@25.21,18.69 ; 29.05,24.575 29.05,30.632 29.343,30.925 v1(30.25,30.925) 33.881,30.925 34.4,31.444 34.4,31.756 34.594,31.951 R10.2 ; v1(30.103,11.352) 30.351,11.6 32.163,11.6 32.213,11.65 32.456,11.65 32.651,11.845 R1.2 ; R5.2 29.25,24.7 25.3,20.75 25.3,18.78 C15.2@25.21,18.69
  Bottom Layer w0.5: v1(27.425,12.075) 27.5,12.15 29.305,12.15 v1(30.103,11.352) ; v1(27.5,38.1) 30.25,35.35 v1(30.25,30.925)
+5USB: C11.2 J9.1 U4.5 U9.1 U9.3 | length 33
  Top Layer w0.5: C11.2 10.75,11.64 10.55,11.84 10.55,12.95 U9.1 10.55,13.05 10.55,13.544 10.964,13.958 11.936,13.958 12.35,13.544 12.35,13.05 v1(12.4,13) ; J9.1 13.55,34.05 13.6,34 U4.5 13.75,32.9 v1(13.7,32.85) ; v1(13.7,25.7) 15.822,23.578 15.822,22.805 15.829,22.798 15.829,22.602 15.822,22.595 15.822,22.015 v1(15.942,21.895) ; v1(13.949,11.829) 15.275,13.154 15.275,15.225 16.075,16.025 v1(16.075,18.192)
  Bottom Layer w0.5: v1(12.4,13) 12.778,13 v1(13.949,11.829) ; v1(13.7,25.7) 13.5,25.9 13.5,32.65 v1(13.7,32.85) ; v1(15.942,21.895) 16.098,21.739 16.098,18.416 16.075,18.393 v1(16.075,18.192)
+16.8: C2.2 C7.2 C13.2 C14.2 C18.2 C19.2 C20.2 C21.2 C22.2 C23.2 C24.2 C25.2 C26.2 C27.2 C28.2 C29.2 C30.2 C31.2 C32.2 Q1.1 Q1.2 Q1.3 U3.4 U5.4 U6.1 U6.3 U8.4 | length 7
  Top Layer w0.2: U6.1@29.492,18.75 28.843,18.75 28.492,19.101 28.492,20.199 28.843,20.55 29.55,20.55 U6.3 ; C14.2@30.8,18.7 v1(30.9,18.8)
  Top Layer w0.254: v1(37.125,12.3) 37.175,12.35 U3.4@37.175,13.4 ; U3.4@37.175,14.2 37.175,14.225 37.175,15.075 U3.4@37.175,15.1
  Top Layer w0.5: U6.1 C14.2@30.8,18.7 ; v1(30.9,18.8) C14.2@31.009,18.909
  other v1: 32.068,4.525 33.079,4.55 31.057,4.635 34.089,4.675 35.1,4.675 32.068,5.275 33.079,5.275 31.057,5.36 35.1,5.4 34.089,5.425 36.111,5.475 32.068,6.025 33.079,6.05 31.057,6.135 34.089,6.175 35.1,6.175 36.111,6.175 37.121,6.225 38.132,6.225 31.057,6.975 32.068,6.975 33.079,6.975 34.089,6.975 35.1,6.975 36.111,6.975 37.121,6.975 38.132,6.975 37.125,13.233 37.125,14.167 37.125,15.1 37.13,26.1 37.13,26.892 37.13,27.683 37.13,28.475 32.05,37.45 32.875,37.45 33.725,37.45 34.8,37.475
DIR_M1: U1.5 U2.4 | length 14.9
  Top Layer w0.254: U2.4 12.938,6.46 13.59,7.112 13.59,10.73 12.918,11.402 12.918,12.248 13.027,12.357 13.027,14.31 13.65,14.933 13.65,18.612 13.375,18.888 13.448,18.961 13.448,19.872 U1.5
DIR_M1_OUT: U2.13 U3.10 | length 21.3
  Top Layer w0.254: U2.13 19.938,6.46 19.98,6.418 20.8,6.418 24.882,10.5 27.8,10.5 31.55,14.25 v1(32.85,14.25) ; v1(34.75,14.95) 34.788,14.988 35.573,14.988 35.575,14.99 U3.10
  Bottom Layer w0.254: v1(32.85,14.25) 33.55,14.95 v1(34.75,14.95)
DIR_M2: U1.7 U7.4 | length 39.9
  Top Layer w0.254: U1.7 15.1,19.325 15.656,18.769 16.786,18.769 22.402,24.385 22.402,24.435 23.112,25.145 23.112,34.084 21.555,35.641 21.555,38.651 21.364,38.843 17.348,38.843 16.723,38.218 16.723,35.868 16.962,35.629 16.962,33.278 ; 17.046,33.194 17.14,33.1 18.86,33.1 19.3,33.54 19.3,33.653 20.028,34.381 U7.4
DIR_M2_OUT: U5.10 U7.13 | length 13.9
  Top Layer w0.254: U7.13 25.905,34.365 27.233,34.365 v1(27.248,34.35) ; v1(31.075,28.45) 31.128,28.45 31.227,28.549 U5.10@35.573,28.549
  Bottom Layer w0.254: v1(27.248,34.35) 27.248,31.452 30.25,28.45 v1(31.075,28.45)
DIR_M3: U1.9 U7.6 | length 13.3
  Top Layer w0.254: U7.6 20.664,31.643 21.107,31.643 21.75,31 21.75,26.912 21.476,26.638 21.063,26.638 v1(21.025,26.6)
  Bottom Layer w0.254: v1(17.376,21.351) 17.376,22.951 v1(21.025,26.6)
DIR_M3_OUT: U7.11 U8.10 | length 7.9
  Top Layer w0.254: U7.11 27.845,31.841 31.696,35.692 31.746,35.692 31.929,35.875 U8.10
GND: C2.1 C7.1 C8.1 C10.1 C13.1 C14.1 C15.1 C18.1 C19.1 C20.1 C21.1 C22.1 C23.1 C24.1 C25.1 C26.1 C27.1 C28.1 C29.1 C30.1 C31.1 C32.1 J6.1 J11.1 Q1.4 R3.2 R6.2 R11.2 R12.1 R13.1 R14.1 U2.9 U2.15 U3.6 U3.8 U3.11 U3.14 U5.6 U5.8 U5.11 U5.14 U6.2 U7.9 U7.15 U8.6 U8.8 U8.11 U8.14 | length 13
  Top Layer w0.2: v1(34.3,27.9) U5.11 ; U5.11 35.052,27.9 36.276,27.9 36.55,28.174 36.55,28.523 U5.8
  Top Layer w0.254: v1(32.243,34.893) 32.28,34.93 32.501,34.93 32.75,35.179 U8.11 ; U8.8@32.39,36.873 32.436,36.827 32.535,36.827 32.727,36.635 32.727,36.536 33.19,36.073 33.704,36.073 33.853,36.223 34.148,36.223 v1(34.175,36.25) ; v4(33.1,26.225) 34.706,26.225 34.879,26.398 U5.14 ; U8.14 34.25,34.605 34.302,34.553 v1(34.302,34.5) ; U3.14 35.052,12.9 35.439,12.9 35.786,13.247 35.786,13.825 35.686,13.925 35.688,13.927 35.751,13.927 v4(35.8,13.878) ; U3.11 35.052,14.396 35.439,14.396 35.753,14.083 v4@35.753,13.991 ; U5.14@35.223,26.4 U5.14@35.237,26.4 ; v4@35.833,13.911 36.573,14.651 U3.8@36.573,14.875 ; U3.6@39,12.2 U3.6@39,12.6
  other v1: 17.924,1.38 39.55,7.3 17.924,9 39.025,12.2 39.025,13.133 39.025,14.067 39.025,15 25.2,17.3 39.2,21.1 39.2,25.7 39.2,26.667 39.2,27.633 39.2,28.6 25.89,29.301 33.3,31.925 35.9,33.8 25.89,36.921 39.5,37.5 39.5,38.5 39.5,39.5
  other v2: 31.025,8.455 19.85,9.645 32.775,10.625 30.9,20.18 27.5,36.72
  other v3: 31.15,1 32.15,1 33.15,1 31.15,2 32.15,2 33.15,2 31.15,3 32.15,3 33.15,3.005 32.4,39.325 33.5,39.325 34.575,39.325
  other v4: 34.775,16.55 29.6,19.65 32.9,23.4 39.475,33.6 39.475,35 39.475,36.2
NetD4_K: D4.K R2.1 | length 3.6
  Top Layer w0.5: R2.1 16.25,33.049 16.976,32.324 17.826,32.324 v2(18.155,31.995)
NetJ5_1: J5.+ Q1.5 Q1.6
NetJ7_1: J7.1 U3.5 | length 3
  Top Layer w0.254: J7.1@37.85,10.65 J7.1
  Top Layer w0.5: J7.1@37.85,10.65 37.85,12.294 U3.5
NetJ8_1: J8.1 U5.7 | length 3
  Top Layer w0.254: J8.1@37.85,30.1 J8.1
  Top Layer w0.5: U5.7 J8.1@37.85,30.1
NetJ10_1: J10.1 U5.5 | length 3
  Top Layer w0.254: J10.1@37.85,24.15 J10.1
  Top Layer w0.5: J10.1@37.85,24.15 U5.5
NetJ12_1: J12.1 U3.7 | length 2.9
  Top Layer w0.254: J12.1@37.85,16.6 J12.1
  Top Layer w0.5: U3.7 J12.1@37.85,16.6
NetJ13_1: J13.1 U8.7 | length 2.7
  Top Layer w0.254: J13.1 J13.1@30.35,38.15
  Top Layer w0.5: J13.1@30.35,38.15 U8.7
NetJ14_1: J14.1 U8.5 | length 3
  Top Layer w0.254: J14.1@36.9,38.15 J14.1
  Top Layer w0.5: U8.5 J14.1@36.9,38.15
NetR1_1: R1.1 U3.1 | length 1.8
  Top Layer w0.254: R1.1 34.217,11.883 34.424,11.883 34.608,11.7 35.243,11.7 35.575,12.032 U3.1
NetR3_1: R3.1 U3.2 | length 2.7
  Top Layer w0.254: R3.1 34.324,10.68 34.642,10.998 35.267,10.998 36.073,11.804 36.073,12.246 U3.2
NetR5_1: R5.1 U5.1 | length 1.6
  Top Layer w0.254: R5.1 34.525,24.756 34.843,25.073 35.071,25.073 35.575,25.577 U5.1
NetR6_1: R6.1 U5.2 | length 3.8
  Top Layer w0.254: R6.1 34.635,23.29 34.717,23.373 34.942,23.373 34.967,23.398 35.623,23.398 35.818,23.593 35.818,23.773 35.88,23.773 36.075,23.968 U5.2
NetR10_1: R10.1 U8.1 | length 2.5
  Top Layer w0.2: R10.1 34.952,33.802 34.952,35.85 34.927,35.875 U8.1
NetR11_1: R11.1 U8.2 | length 1.5
  Top Layer w0.254: U8.2@35.073,36.373 35.15,36.373 35.196,36.327 35.335,36.327 35.527,36.135 35.527,35.841 35.552,35.816 35.552,35.692 35.869,35.374 R11.1
NetR12_2: R12.2 U3.13 | length 4.3
  Top Layer w0.254: R12.2 33.543,16.232 33.543,14.224 34.369,13.398 U3.13
NetR13_2: R13.2 U5.13 | length 2.3
  Top Layer w0.254: R13.2 33.155,27.774 34.032,26.898 U5.13
NetR14_2: R14.2 U8.13 | length 2.1
  Top Layer w0.254: R14.2 33.356,33.474 33.673,33.792 33.673,34.192 33.75,34.269 U8.13
NRST: C3.2 J1.10 U1.4 | length 29.5
  Top Layer w0.254: J1.10 3.47,39.08 4.793,37.757 4.793,31.822 6.885,29.73 cw(c3.549,29.59) 6.882,29.398 6.882,22.106 7.123,21.865 7.123,21.672 8.246,20.55 9.464,20.55 v1(9.475,20.562) ; v1(11.79,21.8) 11.827,21.763 11.827,21.396 12.7,20.523 12.7,18.62 C3.2
  Bottom Layer w0.254: v1(9.475,20.562) 9.513,20.599 9.924,20.599 11.125,21.8 v1(11.79,21.8)
nSLEEP_MCU: U1.25 U2.6 | length 28.2
  Top Layer w0.254: U1.25 11.4,26.85 14.828,23.423 14.828,23.091 15.154,22.765 v1(15.154,22.712)
  Bottom Layer w0.254: v1(12.5,3.92) 15.356,6.776 15.356,21.831 15.154,22.033 v1(15.154,22.712)
nSLEEP_MCU_OUT: U2.11 U3.3 U5.3 U8.3 | length 70.6
  Top Layer w0.2: v1(28.025,22.225) 28.04,22.225 28.247,22.432 33.09,22.432 33.115,22.457 35.324,22.457 36.573,23.706 36.573,25.746 U5.3 ; v1(29.75,26.625) 29.75,29.275 30.6,30.125 34.968,30.125 36.334,31.491 36.334,32.034 36.725,32.425 36.725,35.943 36.272,36.397 35.929,36.397 35.476,36.85 34.925,36.85 U8.3 ; 36.529,11.423 36.575,11.469 U3.3
  Top Layer w0.254: U2.11 19.699,3.92 19.701,3.918 20.84,3.918 21.705,4.783 21.705,6.277 24.903,9.475 30.069,9.475 30.317,9.227 34.333,9.227 36.529,11.423
  Bottom Layer w0.2: v1(28.025,22.225) 29.85,24.05 29.85,25.26 29.75,25.36 v1(29.75,26.625)
  Bottom Layer w0.254: v1(26.175,9.475) 26.175,14.852 26.075,14.952 26.075,20.275 v1(28.025,22.225)
PWM_M1: U1.6 U2.3 | length 15.3
  Top Layer w0.254: U1.6 14.3,18.714 14.175,18.588 14.175,15.283 14.45,15.008 14.45,13.145 13.481,12.176 13.481,12.169 13.372,12.06 13.372,11.59 14.35,10.612 v1(14.35,7.575)
  Bottom Layer w0.254: v1(12.5,7.73) 14.142,7.73 14.297,7.575 v1(14.35,7.575)
PWM_M1_OUT: U2.14 U3.9 | length 21.9
  Top Layer w0.254: U2.14 19.348,7.73 20.03,8.412 21.915,8.412 24.457,10.954 27.129,10.954 28.425,12.25 28.425,12.264 31.288,15.128 v1(32.947,15.128) ; v1(34.2,15.625) 34.24,15.625 34.29,15.675 35.835,15.675 36.073,15.438 36.073,15.05 U3.9
  Bottom Layer w0.254: v1(32.947,15.128) 32.982,15.128 33.492,15.637 34.188,15.637 v1(34.2,15.625)
PWM_M2: U1.8 U7.3 | length 20.5
  Top Layer w0.254: U1.8 17.299,19.924 21.948,24.573 21.948,24.623 22.658,25.334 22.658,33.896 20.903,35.651 U7.3
PWM_M2_OUT: U5.9 U7.14 | length 15.4
  Top Layer w0.254: U7.14 27.709,35.651 27.76,35.6 v1(27.8,35.6) ; v1(31.275,29.525) 31.295,29.505 35.506,29.505 36.073,28.938 36.073,28.55 U5.9
  Bottom Layer w0.254: v1(27.8,35.6) 27.8,32.15 30.15,29.8 31,29.8 v1(31.275,29.525)
PWM_M3: U1.10 U7.5 | length 14.6
  Top Layer w0.254: U1.10 17.277,22.102 18.127,22.102 22.204,26.179 22.204,31.81 20.903,33.111 U7.5
PWM_M3_OUT: U7.12 U8.9 | length 7.6
  Top Layer w0.254: U7.12 27.57,33.111 30.884,36.425 31.371,36.425 31.419,36.377 32.098,36.377 U8.9
PWM_THROWER: U1.31 U2.5 | length 23.9
  Top Layer w0.254: U1.31 11.229,22.05 11.531,22.352 13.713,22.352 14.028,22.037 14.511,22.037 v1(14.548,22)
  Bottom Layer w0.254: v1(12.5,5.19) 13.597,6.287 13.843,6.287 14.902,7.346 14.902,8.273 14.548,8.627 v1(14.548,22)
PWM_THROWER_OUT: J6.2 U2.12 | length 2.6
  Top Layer w0.254: U2.12 18.077,5.037 20.293,5.037 J6.2
SGND: C1.1 C3.1 C4.2 C5.1 C6.1 C9.2 C11.1 C12.1 J1.3 J1.5 J1.9 J2.1 J3.1 J4.1 J9.5 R2.2 U1.14 U1.16 U1.32 U2.2 U2.8 U4.2 U7.2 U7.8 U9.2 | length 12.8
  Top Layer w0.254: J9.5 10.95,35.275 9.975,34.3 v2(9.975,33.025) 9.987,33.038 11.238,33.038 U4.2 ; v2(17.376,25.276) 17.84,25.276 18.014,25.45 18.214,25.25 C6.1 19.34,25.25 20.072,25.982 20.072,29.103 20.27,29.301 U7.8 ; C4.2 19.2,36.921 v2(20.466,36.921)
  other v1: 9.6,21.275 17.28,30.3 15,31.5
  other v2: 12.5,1.38 9.72,4.9 10.4,9 12.5,9 12.1,11.625 11.475,12.95 11.3,15.4 12.1,16.9 11.1,18.4 8.618,18.5 17.376,27.076 5.725,35.275 7.15,35.3 5.675,36.575 7.225,36.575 5.725,39.075 7.225,39.075
SWCLK: J1.4 U1.24 | length 13.6
  Top Layer w0.254: J1.4 3.47,35.27 4.241,34.499 4.241,33.234 4.075,33.068 v1(4.075,31.325) ; v1(5.5,31.896) 5.702,31.798 8.792,28.813 10.049,28.813 10.07,28.792 10.174,28.792 10.3,28.666 U1.24
  Bottom Layer w0.254: v1(4.075,31.325) 4.825,31.325 4.93,31.43 5.034,31.43 v1(5.5,31.896)
SWDIO: J1.2 U1.23 | length 12
  Top Layer w0.254: J1.2 3.257,34 3.5,33.757 v1(3.5,32.925) ; v1(5.475,33) 6.999,33 11.104,28.895 11.104,28.555 11.104,28.179 U1.23
  Bottom Layer w0.254: v1(3.5,32.925) 5.347,32.925 5.422,33 v1(5.475,33)
TIM1_CH1: J3.3 U1.18 | length 26.1
  Top Layer w0.254: J3.3@2.301,24.689 2.301,23.848 6.084,20.065 6.084,18.616 7.72,16.98 9.7,16.98 v1(9.7,16.9)
  Bottom Layer w0.254: v1(9.7,16.9) 9.732,16.9 10.543,17.711 12.098,17.711 12.644,18.257 12.644,21.119 14.948,23.423 14.948,25.306 15.1,25.459 v1(15.1,27.8)
TIM1_CH2: J3.4 U1.19 | length 21.4
  Top Layer w0.254: J3.4@4.92,23.34 4.92,22.011 6.538,20.393 6.538,18.997 7.955,17.58 v1(9.531,17.58)
  Bottom Layer w0.254: v1(9.531,17.58) 10.473,18.522 10.473,19.703 14.277,23.507 14.277,28.297 14.201,28.373 v1(14.201,28.426)
TIM3_CH1: J4.3 U1.27 | length 16.6
  Top Layer w0.254: J4.3@2.36,15.63 2.46,15.73 5.012,15.73 5.696,15.046 7.088,15.046 7.425,15.383 7.425,15.691 v1(7.462,15.728)
  Bottom Layer w0.254: v1(7.462,15.728) 7.462,15.781 7.083,16.16 7.083,20.815 7.123,20.855 7.123,23.449 8.056,24.381 8.156,24.381 v1(9.125,25.351)
TIM3_CH2: J4.4 U1.28 | length 14.1
  Top Layer w0.254: J4.4@4.9,14.36 5.06,14.2 6.923,14.2 v1(8.198,15.475) ; v1(7.675,21.901) 7.675,23.749 8.376,24.45 U1.28
  Bottom Layer w0.254: v1(7.675,21.901) 7.675,20.3 7.537,20.162 7.537,17.228 8.198,16.567 v1(8.198,15.475)
TIM4_CH1: J2.3 U1.29 | length 18
  Top Layer w0.254: J2.3 3.335,9.92 6.92,13.505 8.255,13.505 9.033,14.283 9.033,15.362 v1(8.995,15.4)
  Bottom Layer w0.254: v1(8.995,15.4) 8.995,16.182 8.652,16.525 8.652,16.755 7.991,17.416 7.991,19.974 8.469,20.452 8.469,23.095 v1(9.125,23.751)
TIM4_CH2: J2.4 U1.30 | length 29.5
  Bottom Layer w0.254: J2.4 2.333,7.285 5.345,4.273 9.98,4.273 11.027,5.32 11.027,12.511 9.547,13.991 9.547,16.272 9.106,16.713 9.106,16.943 8.979,17.071 8.979,17.974 9.245,18.24 9.245,19.69 8.923,20.011 8.923,22.078 9.125,22.28 v1(9.125,22.951)
USB_D_N: J9.2 U1.21 U4.4 | length 8.9
  Top Layer w0.26: U1.21 12.7,28.812 12.53,28.982 12.53,29.932 12.73,30.132 12.73,31.53 13.13,31.93 13.372,31.93 U4.4@13.58,32.138 ; J9.2 12.83,35.68 12.83,35.078 12.805,35.053 12.805,32.695 13.23,32.27 13.58,32.27 U4.4
USB_D_P: J9.3 U1.22 U4.3 | length 9
  Top Layer w0.26: U4.3 U4.3@11.52,32.1 ; U1.22 11.9,28.812 12.07,28.982 12.07,30.122 12.27,30.323 12.27,31.555 11.895,31.93 11.628,31.93 11.458,32.1 11.628,32.27 11.82,32.27 12.345,32.795 12.345,35.053 12.32,35.078 12.32,35.68 J9.3
pads on no net: J1.6 J1.7 J1.8 J2.5 J3.5 J4.5 J6.3 J6.4 J6.5 J9.4 J9.S1 J9.S2 J9.S3 J9.S4 J9.S5 J9.S6 U1.2 U1.3 U1.11 U1.12 U1.13 U1.20 U1.26 U2.7 U2.10 U3.12 U4.1 U5.12 U6.4 U7.7 U7.10 U8.12 U9.4

## Polygon pours and split planes (outlines as drawn)
GND on GND 2 "GND_L03_P026" (solid, pour order 26): 40,0 16.562,0 16.562,10.987 20.525,14.95 23.5,14.95 23.55,20.825 24.875,22.15 24.875,40 39.95,40
SGND on GND 2 "SGND_L03_P000" (solid, pour order 0): 23.35,40 23.35,24.75 18.7,20.1 18.7,18.2 15.6,15.1 15.6,0 0,0 0,40
GND on GND 1 "GND_L02_P023" (solid, pour order 23): 40,40 40,0 16.578,0 16.578,10.975 20.525,14.95 23.5,14.95 23.55,20.825 24.875,22.15 24.925,40
SGND on GND 1 "SGND_L02_P001" (solid, pour order 1): 14.95,0 15.175,0 15.6,0 15.6,15 18.75,18.15 18.75,20.15 23.35,24.75 23.35,40 0,40 0,0
+16.8 on Top Layer "+16.8_L01_P035" (solid, pour order 35): 30.5,7.5 38.5,7.5 38.5,4 30.5,4
NetJ5_1 on Top Layer "NETJ5_1_L01_P030" (solid, pour order 30): 29.425,8.65 24.8,8.65 24.75,8.6 24.75,4.3 24.8,4.3 24.8,0.1 29.425,0.1
+16.8 on Bottom Layer "+16.8_L04_P032" (solid, pour order 32): 30.525,38.512 38.337,38.512 38.55,38.512 38.55,4.225 30.525,4.225
GND on Bottom Layer "GND_L04_P036" (solid, pour order 36): 40,4 40,40 38.55,40 38.55,4
GND on Bottom Layer "GND_L04_P037" (solid, pour order 37): 38.569,38.566 38.503,38.5 31.5,38.5 31.5,40 40,40 40,38.5 38.537,38.5
+16.8 on Bottom Layer "+16.8_L04_P033" (solid, pour order 33): 31.5,38.5 31.5,37.1 31.575,37.025 38.575,37.025 38.575,38.487 38.55,38.512 38.537,38.5

## Silkscreen, mask and mechanical layers (free items; w line width, h text height)
Top Overlay:
  text "+" at 24.754,2.987 h1
  text "-" at 34.054,2.904 h1
Bottom Overlay:
  text "sn2x" at 23.046,15.204 h1.52